# Altium PCB main.PcbDoc
Units mm, origin at the board's own origin, x right, y up, seen from the top; angles counter-clockwise.
Board outline 77.5 x 83.5 mm, 2 copper layers (Top Layer, Bottom Layer); 79 components, 62 nets, 302 pads, 57 vias.
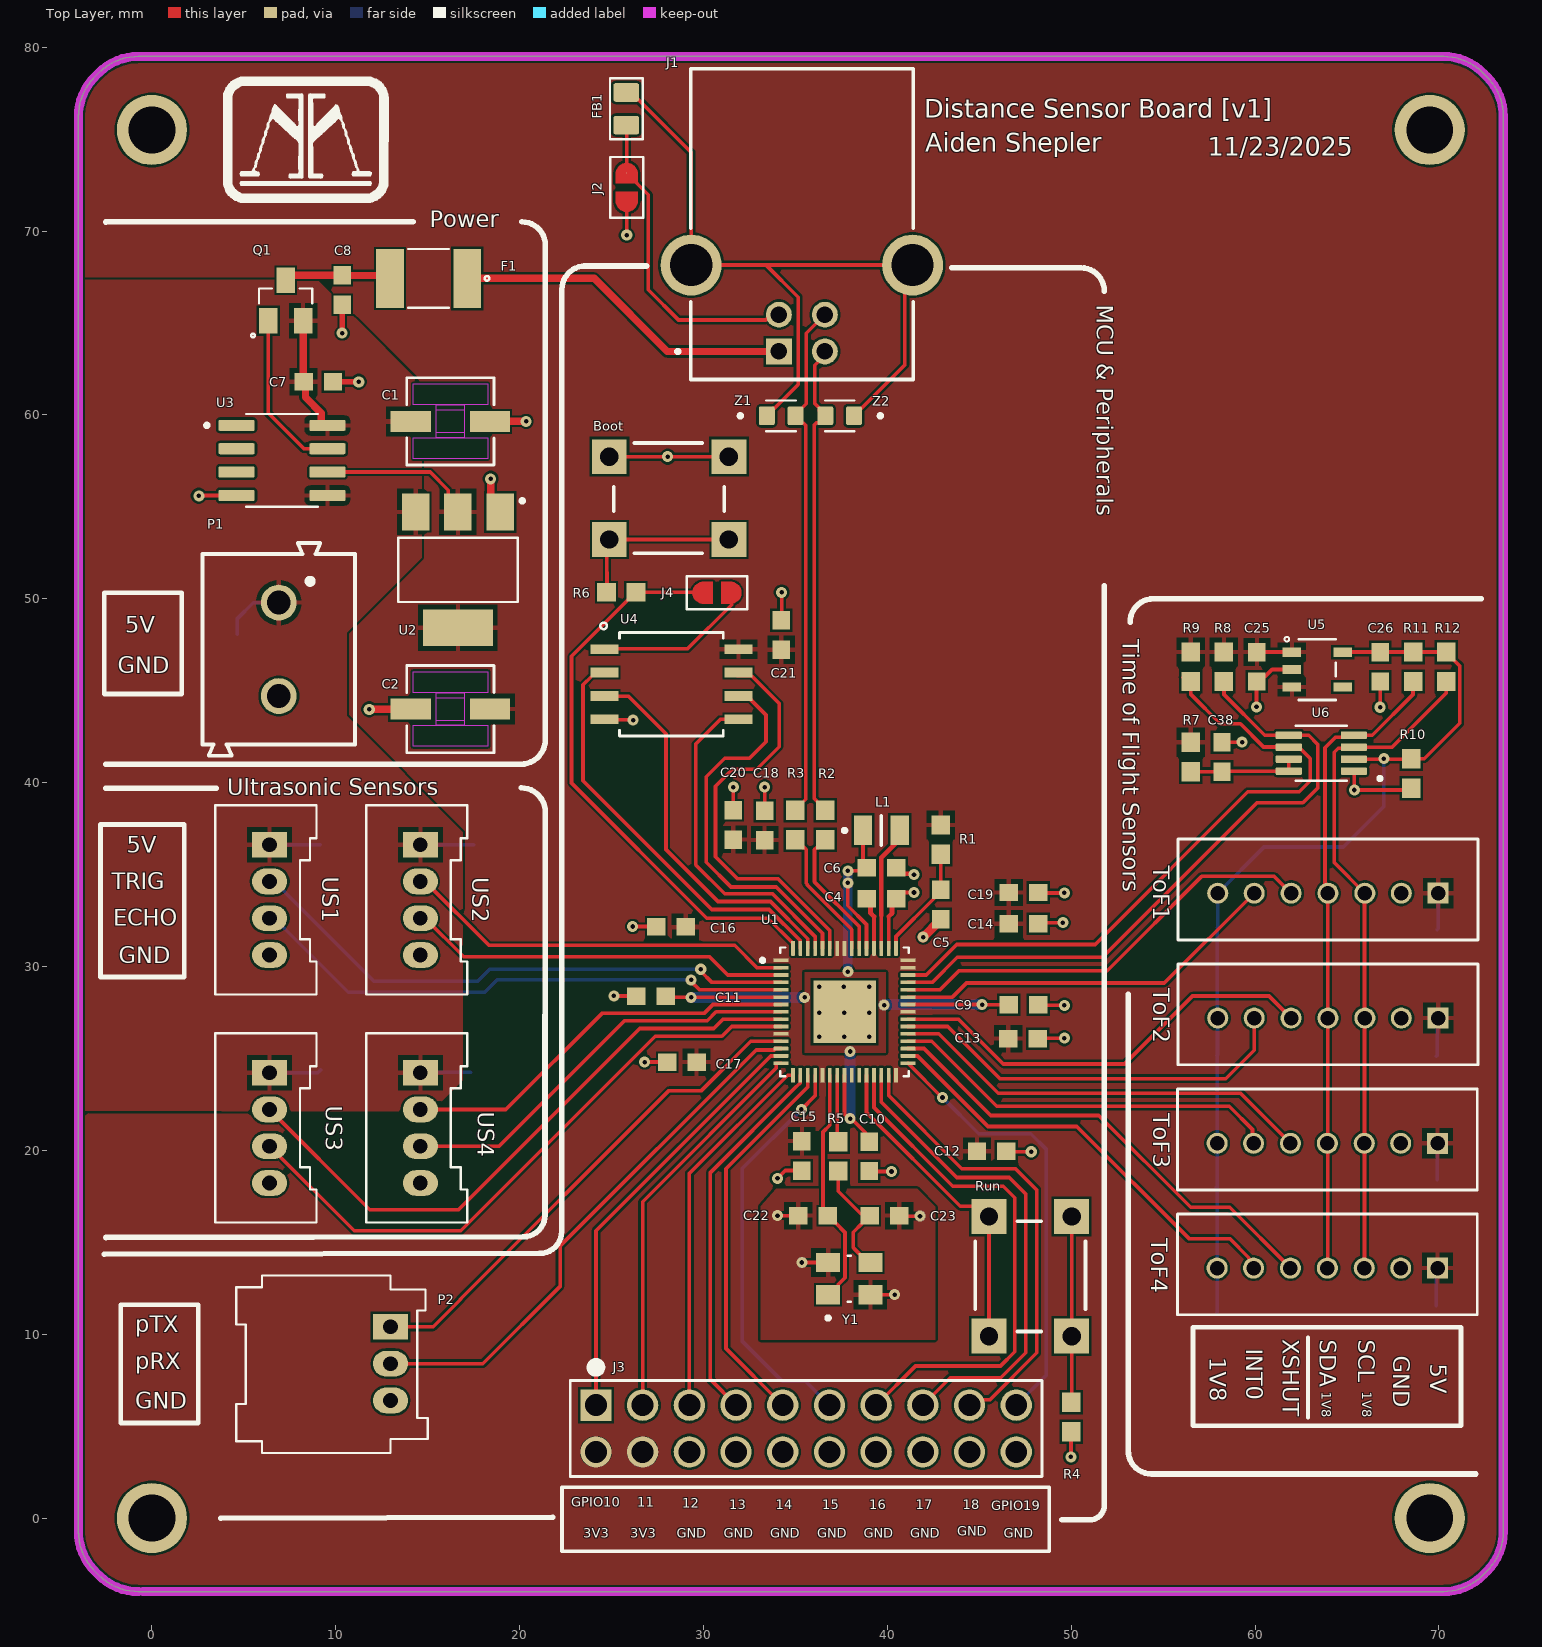
[diagram p0: Top Layer view]
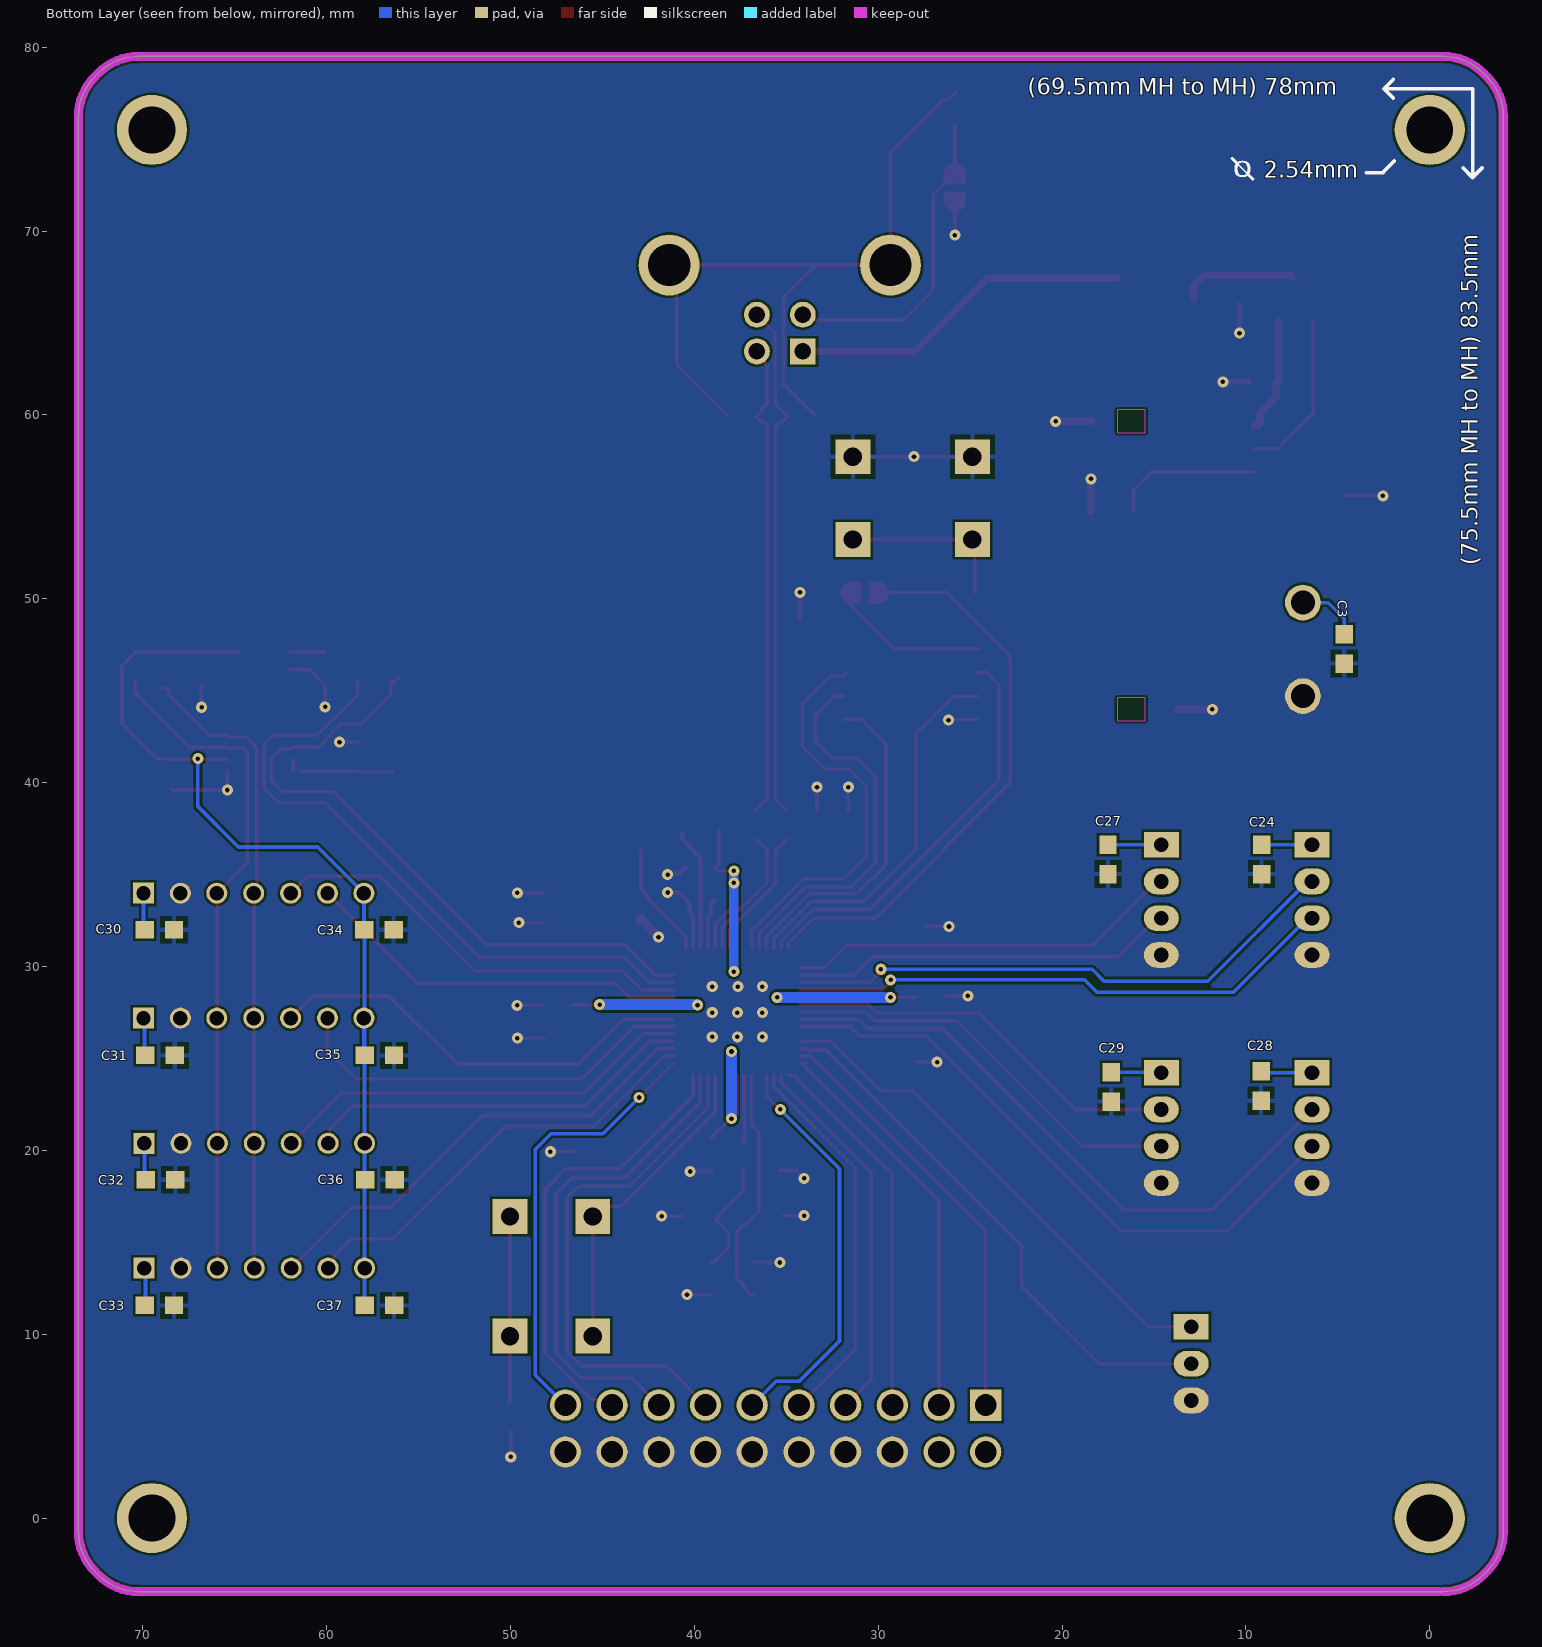
[diagram p1: Bottom Layer view, seen from below]

## Layer stack, top to bottom
Top Solder: solder mask 0.0102, Solder Resist, Dk 3.5
Top Layer: signal copper 0.0356
Dielectric 1: dielectric 0.32, FR-4, Dk 4.8
Bottom Layer: signal copper 0.0356
Bottom Solder: solder mask 0.0102, Solder Resist, Dk 3.5

## Board outline
-3.102,-2.898 cw(c-0.934,-0.73) -4,-0.73 -4,76.23 cw(c-0.934,76.23) -3.102,78.398 -2.898,78.602 cw(c-0.73,76.434) -0.73,79.5 70.23,79.5 cw(c70.23,76.434) 72.398,78.602 72.602,78.398 cw(c70.434,76.23) 73.5,76.23 73.5,-0.73 cw(c70.434,-0.73) 72.602,-2.898 72.398,-3.102 cw(c70.23,-0.934) 70.23,-4 -0.73,-4 cw(c-0.73,-0.934) -2.898,-3.102

## Design rules (kind name [scope] priority, off if disabled: settings)
Clearance [All] p1: gap=0.125 ignorepadtopadclearanceinfootprint=FALSE
DiffPairsRouting [All] p1: maxlimit=0.254 minlimit=0.2 mostfreqgap=0.254 toplayer_minwidth=0.2 toplayer_maxwidth=0.381 toplayer_prefwidth=0.2 bottomlayer_minwidth=0.2 bottomlayer_maxwidth=0.381 bottomlayer_prefwidth=0.2 maxuncoupledlength=12.7
PolygonConnect Polygon_5V_Connect [IsNamedPolygon('T.5V')] p1: connectstyle=Relief reliefconductorwidth=0.254 reliefentries=4 polygonreliefangle="90 Angle" airgapwidth=0.254
PolygonConnect Polygon_1V1-2_Connect_Direct [IsNamedPolygon('T.1V1-2')] p2: connectstyle=Direct reliefconductorwidth=0.254 reliefentries=4 polygonreliefangle="90 Angle" airgapwidth=0.254
PolygonConnect Polygon_3V3-1_Connect_Direct [IsNamedPolygon('T.3V3-1')] p3: connectstyle=Direct reliefconductorwidth=0.254 reliefentries=4 polygonreliefangle="90 Angle" airgapwidth=0.254
PolygonConnect Polygon_3V3-2/GND-12/1V1-1_Connect_Direct [IsNamedPolygon('T.1V1-1') or IsNamedPolygon('T.GND-1') or IsNamedPolygon('T.3V3-2') or IsNamedPolygon('B.GND-1') vs IsVia] p4: connectstyle=Direct reliefconductorwidth=0.254 reliefentries=4 polygonreliefangle="90 Angle" airgapwidth=0.254
PolygonConnect Polygon_3V3-2/GND-12/1V1-1_Connect_Relief90 [IsNamedPolygon('T.1V1-1') or IsNamedPolygon('T.GND-1') or IsNamedPolygon('B.GND-1') or IsNamedPolygon('T.3V3-2') vs (IsThruPin or IsSMTPin) and (PadShape_AllLayers <> 'Round')] p5: connectstyle=Relief reliefconductorwidth=0.254 reliefentries=4 polygonreliefangle="90 Angle" airgapwidth=0.254
RoutingVias [All] p1: holewidth=0.711 width=1.27 viastyle="Through Hole" minholewidth=0.2 minwidth=0.35 maxholewidth=0.711 maxwidth=1.27
SolderMaskExpansion [All] p1: expansion=0.102 istentingtop=FALSE
SupplyNets "Schematic Supply Nets_4" [InNet('1V1')] p1: voltage=0.000
SupplyNets "Schematic Supply Nets_3" [InNet('1V8')] p2: voltage=0.000
SupplyNets "Schematic Supply Nets_2" [InNet('5V')] p3: voltage=0.000
SupplyNets "Schematic Supply Nets_1" [InNet('GND')] p4: voltage=0.000
SupplyNets "Schematic Supply Nets" [InNet('3V3')] p5: voltage=0.000
Width [All] p1: maxlimit=0.6 minlimit=0.2 preferedwidth=0.2
29 further rules are at their usual default settings.

## Classes and differential pairs
component class MCU: ` Boot C1 C2 C3 C4 C5 C6 C7 C8 C9 C10 C11 C12 C13 C14 C15 C16 C17 C18 C19 C20 C21 C22 C23 F1 FB1 J1 J2 J3 J4 L1 P1 P2 Q1 R1 R2 R3 R4 R5 R6 Run U1 U2 U3 U4 Y1 Z1 Z2
component class Distance-Sensors: C24 C25 C26 C27 C28 C29 C30 C31 C32 C33 C34 C35 C36 C37 C38 R7 R8 R9 R10 R11 R12 ToF1 ToF2 ToF3 ToF4 U5 U6 US1 US2 US3 US4
differential pair DX: +DX_P -DX_N
differential pair D: +D_P -D_N

## Components (designator, comment, footprint, x,y, rotation, side; value= is the part's Value field where it differs from the comment)
Boot "BOOT" SPST-PUSH-BUTTON 28.125,55.475 r90 top (schematic designator B2)
C1 "10uF" RADIAL_CAN_CAP_4_X_5.8_SMD 16.234,59.65 r0 top
C2 "10uF" RADIAL_CAN_CAP_4_X_5.8_SMD 16.234,44 r180 top
C3 "Cap" CAPC0603 4.65,47.275 r270 bottom value=100nF
C4 "Cap" CAPC0603 39.675,33.675 r0 top value=4.7uF
C5 "Cap" CAPC0603 42.9,33.375 r270 top value=4.7uF
C6 "Cap" CAPC0603 39.675,35.375 r0 top value=4.7uF
C7 "Cap" CAPC0603 9.05,61.8 r0 top value=100nF
C8 "Cap" CAPC0603 10.35,66.8 r90 top value=100nF
C9 "Cap" CAPC0603 47.4,27.925 r0 top value=100nF
C10 "Cap" CAPC0603 39.025,19.675 r270 top value=4.7uF
C11 "Cap" CAPC0603 27.15,28.375 r180 top value=100nF
C12 "Cap" CAPC0603 45.675,19.95 r0 top value=100nF
C13 "Cap" CAPC0603 47.375,26.075 r0 top value=100nF
C14 "Cap" CAPC0603 47.4,32.325 r0 top value=100nF
C15 "Cap" CAPC0603 35.35,19.7 r270 top value=100nF
C16 "Cap" CAPC0603 28.225,32.15 r180 top value=100nF
C17 "Cap" CAPC0603 28.825,24.8 r180 top value=100nF
C18 "Cap" CAPC0603 33.325,37.675 r90 top value=100nF
C19 "Cap" CAPC0603 47.4,34.025 r0 top value=100nF
C20 "Cap" CAPC0603 31.625,37.7 r90 top value=100nF
C21 "Cap" CAPC0603 34.225,48.025 r90 top value=100nF
C22 "Cap" CAPC0603 35.95,16.45 r180 top value=100nF
C23 "Cap" CAPC0603 39.85,16.45 r0 top value=100nF
C24 "Cap" CAPC0603 9.15,35.825 r270 bottom value=100nF
C25 "Cap" CAPC0603 60.1,46.3 r270 top value=1uF
C26 "Cap" CAPC0603 66.8,46.3 r270 top value=1uF
C27 "Cap" CAPC0603 17.5,35.825 r270 bottom value=100nF
C28 "Cap" CAPC0603 9.175,23.5 r270 bottom value=100nF
C29 "Cap" CAPC0603 17.325,23.45 r270 bottom value=100nF
C30 "Cap" CAPC0603 69.1,32 r180 bottom value=100nF
C31 "Cap" CAPC0603 69.056,25.164 r180 bottom value=100nF
C32 "Cap" CAPC0603 69.025,18.4 r180 bottom value=100nF
C33 "Cap" CAPC0603 69.1,11.564 r180 bottom value=100nF
C34 "Cap" CAPC0603 57.156,32 r180 bottom value=100nF
C35 "Cap" CAPC0603 57.131,25.164 r180 bottom value=100nF
C36 "Cap" CAPC0603 57.1,18.4 r180 bottom value=100nF
C37 "Cap" CAPC0603 57.125,11.564 r180 bottom value=100nF
C38 "Cap" CAPC0603 58.2,41.4 r90 top value=100pF
F1 "MF-MSMF050-2" FUSM4632X85 15.05,67.425 r180 top
FB1 "MH2029-300Y" L0805 25.8,76.65 r270 top
J1 "USB-B" SAMTEC_USB-B-S-X-X-TH 35.35,68.15 r180 top
J2 "Thru-Hole Jumper" "[Jumper] Solderable Jumper" 25.825,72.375 r270 top
J3 "[Connector] 879142016" "[Connector] CONN20" 24.15,6.14 r0 top
J4 "Thru-Hole Jumper" "[Jumper] Solderable Jumper" 30.73,50.325 r0 top
L1 "3.3uH" 2016_SMD_Inductor 39.675,37.4 r0 top
P1 "2 port screw" "[CONNECTOR] 5MM_2PORT_SCREW" 6.9,47.25 r270 top
P2 "UART" MOLEX-HDR-1X3-SHERLOCK-RA 12.975,10.4 r90 top
Q1 "FDN340P" SOT95P240X120-3N 7.275,66.225 r90 top
R1 "Res" RES0603 42.9,36.9 r270 top value=33
R2 "Res" RES0603 36.625,37.7 r270 top value=27
R3 "Res" RES0603 35,37.7 r270 top value=27
R4 "Res" RES0603 50,5.5 r90 top value=1k
R5 "Res" RES0603 37.325,19.675 r90 top value=1k
R6 "Res" RES0603 25.525,50.35 r0 top value=1k
R7 "Res" RES0603 56.5,41.4 r270 top value=200k
R8 "Res" RES0603 58.3,46.3 r270 top value=10k
R9 "Res" RES0603 56.5,46.3 r270 top value=10k
R10 "Res" RES0603 68.5,40.5 r270 top value=300k
R11 "Res" RES0603 68.6,46.3 r270 top value=10k
R12 "Res" RES0603 70.4,46.3 r270 top value=10k
Run "BOOT" SPST-PUSH-BUTTON 47.775,13.15 r0 top (schematic designator B1)
ToF1 "ToF 1" 7POS_2MM_CONN 69.958,33.986 r0 top
ToF2 "ToF 2" 7POS_2MM_CONN 69.958,27.195 r0 top
ToF3 "ToF 3" 7POS_2MM_CONN 69.925,20.386 r0 top
ToF4 "ToF 4" 7POS_2MM_CONN 69.925,13.595 r0 top
U1 "[MCU] RP2350" QFN40P700X700X90-61N 37.67,27.536 r0 top
U2 "NCP1117LPST33T3G" SOT230P700X175-4N 16.641,51.575 r270 top
U3 "LMV358IDR" SOIC-8 7.075,57.525 r0 top
U4 "W25Q128JVSIQ TR" SOIC_208MIL_WIN 28.25,45.35 r0 top
U5 "ADPL40502AUJZ-1.8-R7" TSOT-23-5_UJ-5_ADI 63.378,46.15 r0 top
U6 "PCA9306DCTR" SOP65P400X130-8N 63.6,41.6 r180 top
US1 "USS1" MOLEX-HDR-1X4-SHERLOCK-VERT 6.4,36.625 r90 top
US2 "USS2" MOLEX-HDR-1X4-SHERLOCK-VERT 14.6,36.625 r90 top
US3 "USS3" MOLEX-HDR-1X4-SHERLOCK-VERT 6.4,24.225 r90 top
US4 "USS4" MOLEX-HDR-1X4-SHERLOCK-VERT 14.6,24.225 r90 top
Y1 "ABM8-272-T3" XTAL_ABM8-272-T3 37.925,13.025 r90 top
Z1 "VAR" VARC1608X56N 34.22,59.95 r0 top
Z2 "VAR" VARC1608X56N 37.405,59.95 r180 top

## Footprints (in the part's own frame and the unit in brackets; to place one, negate y for a bottom-side part, rotate by r counter-clockwise, add the part's x,y. Pads: shape width x height; smd on the part's side, far side on the other; paste and mask are expansions set on the pad)
7POS_2MM_CONN [mil]
  rect 45x45 / inner round 45 / far side rect 45x45 hole 31: 1(0,0)
  round 45 hole 31: 2(-79,0) 3(-157,0) 4(-236,0) 5(-315,0) 6(-394,0) 7(-472,0)
  silkscreen extent -557,-100 85,116, body extent -556,-100 86,118, height 337
2016_SMD_Inductor [mm] "0806 (2016 Metric)"
  rect 1x1.6 smd: 1(-1,0) 2(1,0)
  silkscreen extent -2.1,-0.8 0,0.8, body extent -1,-0.8 1,0.8, height 0.95
"[CONNECTOR] 5MM_2PORT_SCREW" [mm] "5.08 mm pitch 2 port screw terminal / 691213510002"
  round 1.95 hole 1.3: 1(-2.54,0) 2(2.54,0)
  silkscreen extent -5.78,-4.15 5.78,4.15, body extent -5.68,-4.04 5.68,4.06, height 10
"[Connector] CONN20" [mil]
  rect 67x67 / inner round 67 / far side rect 67x67 hole 47: 1(0,0)
  round 67 hole 47: 2(0,-100) 3(100,0) 4(100,-100) 5(200,0) 6(200,-100) 7(300,0) 8(300,-100) 9(400,0) 10(400,-100) 11(500,0) 12(500,-100) 13(600,0) 14(600,-100) 15(700,0) 16(700,-100) 17(800,0) 18(800,-100) 19(900,0) 20(900,-100)
  silkscreen extent -55,-153 955,91, body extent -50,-151 950,45, height 325
"[Jumper] Solderable Jumper" [mil]
  round 1 smd: 1(-30.71,0) 2(30.71,0)
  Top Layer region: 8.9,-23.62 8.9,23.62 28.9,23.62 28.9,23.62 39.15,21.28 47.37,14.73 51.93,5.26 51.93,-5.26 47.37,-14.73 39.15,-21.28 28.9,-23.62 28.9,-23.62
  Top Layer region: -8.9,-23.62 -8.9,23.62 -28.9,23.62 -28.9,23.62 -39.15,21.28 -47.37,14.73 -51.93,5.26 -51.93,-5.26 -47.37,-14.73 -39.15,-21.28 -28.9,-23.62 -28.9,-23.62
  silkscreen extent -65,-35 65,35
CAPC0603 [mm] "Chip Capacitor, 2-Leads, Body 1.60x0.80mm, IPC Medium Density"
  rect 1x0.95 smd: 1(-0.8,0) 2(0.8,0)
  body extent -0.88,-0.48 0.87,0.48, height 0.8
FUSM4632X85 [mm]
  rect 1.5x3.2 smd: 1(-2.1,0) 2(2.1,0)
  silkscreen extent -3.3,-1.6 1.1,1.6, body extent -2.27,-1.62 2.27,1.62, height 1.1
L0805 [mil]
  rrect25% 40x55 smd: 1(-35,0) 2(35,0)
  silkscreen extent -65,-35 65,35, body extent -39,-24 39,24, height 43
MOLEX-HDR-1X3-SHERLOCK-RA [mm]
  rect 1.397x1.905 hole 0.8: 1(0,0)
  oval 1.397x1.905 hole 0.8: 2(-2,0) 3(-4,0)
  silkscreen extent -6.86,-2.03 2.79,8.38, body extent -6.88,-1.99 2.82,8.51, height 5.75
MOLEX-HDR-1X4-SHERLOCK-VERT [mm]
  rect 1.397x1.905 hole 0.8: 1(0,0)
  oval 1.397x1.905 hole 0.8: 2(-2,0) 3(-4,0) 4(-6,0)
  silkscreen extent -8.15,-2.55 2.15,2.95, body extent -8.13,-2.57 2.17,2.98, height 8.5
QFN40P700X700X90-61N [mm] "RP2350"
  rrect25% 0.81x0.2 smd paste+0 mask+0.102: 1(-3.45,2.8) 2(-3.45,2.4) 3(-3.45,2) 4(-3.45,1.6) 5(-3.45,1.2) 6(-3.45,0.8) 7(-3.45,0.4) 8(-3.45,0) 9(-3.45,-0.4) 10(-3.45,-0.8) 11(-3.45,-1.2) 12(-3.45,-1.6) 13(-3.45,-2) 14(-3.45,-2.4) 15(-3.45,-2.8) 31(3.45,-2.8) 32(3.45,-2.4) 33(3.45,-2) 34(3.45,-1.6) 35(3.45,-1.2) 36(3.45,-0.8) 37(3.45,-0.4) 38(3.45,0) 39(3.45,0.4) 40(3.45,0.8) 41(3.45,1.2) 42(3.45,1.6) 43(3.45,2) 44(3.45,2.4) 45(3.45,2.8)
  rrect25% 0.2x0.81 smd paste+0 mask+0.102: 16(-2.8,-3.45) 17(-2.4,-3.45) 18(-2,-3.45) 19(-1.6,-3.45) 20(-1.2,-3.45) 21(-0.8,-3.45) 22(-0.4,-3.45) 23(0,-3.45) 24(0.4,-3.45) 25(0.8,-3.45) 26(1.2,-3.45) 27(1.6,-3.45) 28(2,-3.45) 29(2.4,-3.45) 30(2.8,-3.45) 46(2.8,3.45) 47(2.4,3.45) 48(2,3.45) 49(1.6,3.45) 50(1.2,3.45) 51(0.8,3.45) 52(0.4,3.45) 53(0,3.45) 54(-0.4,3.45) 55(-0.8,3.45) 56(-1.2,3.45) 57(-1.6,3.45) 58(-2,3.45) 59(-2.4,3.45) 60(-2.8,3.45)
  rect 3.4x3.4 smd paste-0.62 mask+0.102: 61(0,0)
  silkscreen extent -4.56,-3.5 3.5,3.5, body extent -3.55,-3.55 3.55,3.55, height 0.96
RADIAL_CAN_CAP_4_X_5.8_SMD [mil]
  rect 86x45 smd paste+0 mask+0: 1(-85,0) 2(85,0)
  Top Layer keep-out region: -30,-35 -30,35 30,35 30,-35
  Top Layer keep-out region: -80,-80 -80,-35 80,-35 80,-80
  Top Layer keep-out region: -80,35 -80,80 80,80 80,35
  Keep-Out Layer region: -30,-24.5 -30,24.5 30,24.5 30,-24.5
  silkscreen extent -94,-94 94,94, body extent -108,-89 108,89, height 242
RES0603 [mm] "Chip Resistor, 2-Leads, Body 1.60x0.80mm, IPC Medium Density"
  rect 1.05x1 smd: 1(-0.8,0) 2(0.8,0)
  body extent -0.88,-0.48 0.87,0.47, height 0.8
SAMTEC_USB-B-S-X-X-TH [mm]
  rect 1.408x1.408 / inner round 1.408 / far side rect 1.408x1.408 hole 0.9: 1(1.25,4.7)
  round 1.408 hole 0.9: 2(-1.25,4.7) 3(-1.25,2.7) 4(1.25,2.7)
  round 3.316 hole 2.3: S1(-6.02,0) S2(6.02,0)
  silkscreen extent -6.05,-10.67 6.85,6.22, body extent -7.25,-10.39 7.25,6.11, height 10.7
SOIC-8 [mm] "127P599X175-8N"
  rrect25% 1.97x0.6 smd: 1(-2.47,1.905) 2(-2.47,0.635) 3(-2.47,-0.635) 4(-2.47,-1.905) 5(2.47,-1.905) 6(2.47,-0.635) 7(2.47,0.635) 8(2.47,1.905)
  silkscreen extent -4.19,-2.52 1.95,2.52, body extent -3,-2.45 3,2.45, height 1.75
SOIC_208MIL_WIN [mil]
  rect 60x21 smd paste+0 mask+0: 1(-143.5,75) 2(-143.5,25) 3(-143.5,-25) 4(-143.5,-75) 5(143.5,-75) 6(143.5,-25) 7(143.5,25) 8(143.5,75)
  silkscreen extent -152,-111 111,132, body extent -159,-106 159,106, height 85
SOP65P400X130-8N [mm]
  rrect25% 1.42x0.4 smd: 1(-1.77,0.975) 2(-1.77,0.325) 3(-1.77,-0.325) 4(-1.77,-0.975) 5(1.77,-0.975) 6(1.77,-0.325) 7(1.77,0.325) 8(1.77,0.975)
  silkscreen extent -3.29,-1.5 1.4,1.5, body extent -2,-1.47 2,1.47, height 1.3
SOT95P240X120-3N [mm]
  rect 1.4x1 smd: 1(-1.1,0.95) 2(-1.1,-0.95) 3(1.1,0)
  silkscreen extent -2,-1.45 0.65,1.88, body extent -1.25,-1.46 1.25,1.46, height 1.12
SOT230P700X175-4N [mm]
  rect 2x1.5 smd: 1(-3.15,2.3) 2(-3.15,0) 3(-3.15,-2.3)
  rect 2x3.8 smd: 4(3.15,0)
  silkscreen extent -3.85,-3.25 1.75,3.6, body extent -3.5,-3.25 3.5,3.25, height 1.8
SPST-PUSH-BUTTON [mm] "1825910-6"
  rect 1.9x1.9 hole 1: 1(2.25,3.25) 2(2.25,-3.25) 3(-2.25,-3.25) 4(-2.25,3.25)
  silkscreen extent -3,-3 3,3, body extent -3,-4 2.99,3.8, height 5.11
TSOT-23-5_UJ-5_ADI [mil] "SOT23_5, Thin"
  rect 39.5x20 smd paste+0 mask+0: 1(-54.25,37.4) 2(-54.25,0) 3(-54.25,-37.4) 4(54.25,-37.4) 5(54.25,37.4)
  silkscreen extent -70,-65 40,70, body extent -60,-60 60,60, height 39
VARC1608X56N [mm]
  rrect25% 0.87x1.02 smd: 1(-0.78,0) 2(0.78,0)
  silkscreen extent -2.31,-0.83 0.8,0.83, body extent -0.8,-0.4 0.8,0.4, height 0.33
XTAL_ABM8-272-T3 [mm]
  rect 1.05x1.3 smd: 1(-0.875,1.15) 2(-0.875,-1.15) 3(0.875,-1.15) 4(0.875,1.15)
  silkscreen extent -2.24,-0.09 1.25,1.25, body extent -1.25,-1.6 1.25,1.6, height 0.7

## Part data
Boot Run: library part 1825910-6, "SWITCH TACTILE SPST-NO 0.05A 24V", Contact Current Rating=50mA, Contact Resistance=100mR, Manufacturer="TE Connectivity Alcoswitch", Max Operating Temperature=85°C, Max Voltage Rating (DC)=24V, Min Operating Temperature=-35°C, Operating Force=160gf, Package Quantity=750, Supplier Part Number 1=450-1650-ND, Actuator Length=0.055inch, Actuator Material=PBT, Actuator Type=Standard, Category="Pushbutton Switches", ComponentLink1Description=https://datasheet.ciiva.com/30199/1825910-6rqpn1825910-6-30199520.pdf?src-supplier=Onlinecomponents.com, ComponentLink1URL=https://datasheet.ciiva.com/30199/1825910-6rqpn1825910-6-30199520.pdf?src-supplier=Onlinecomponents.com, ComponentLink2Description=https://datasheet.ciiva.com/15184/getdatasheetpartid-395915-15184509.pdf?src-supplier=Verical, ComponentLink2URL=https://datasheet.ciiva.com/15184/getdatasheetpartid-395915-15184509.pdf?src-supplier=Verical, Contact Material="Copper Alloy", Contact Plating=Silver, Electrical Life=100000Cycles, ELV=Compliant, Illumination Type=Non-Illuminated,Illuminated, Lead Free="Lead Free", Length=5.99mm, Manufacturer Part Number=1825910-6, Max Current Rating=50mA, Mechanical Life=100000Cycles, Mount="Through Hole", Orientation=Straight, Packaging="Loose Piece", Pricing 1="1=0,10000, 10=0,10100, 25=0,09560, 100=0,08700, 250=0,08180, 500=0,07484, 1000=0,06265, 2500=0,06092, 5000=0,05743 (USD)", REACH SVHC=Unknown, RoHS=Yes, Stock 1=97530, Supplier 1=Digi-Key, Switch Function=Off-Mom, Switch Travel=0.25mm, Termination="PC Pins", Throw Configuration=SPST, Type=Switch
C1 C2: library part EEE-FK1E100R, "10uF electrolytic cap, radial can, SMD", Manufacturer_Name=Panasonic, Copyright="Copyright (C) 2025 Ultra Librarian. All rights reserved.", Manufacturer_Part_Number=EEE-FK1E100R
C3 C4 C5 C6 C7 C8 C9 C10 C11 C12 C13 C14 C15 C16 C17 C18 C19 C20 C21 C22 C23 C24 C25 C26 C27 C28 C29 C30 C31 C32 C33 C34 C35 C36 C37 C38: Supplier Part Number 1=1276-1000-1-ND, Supplier 1=Digi-Key
F1: "[Fuse] Polymeric PTC Resettable Fuse 15V 500 mA Ih Surface Mount 1812 (4532 Metric), Concave", Package="1812 Bourns", Availability="In Stock", Check_prices=https://www.snapeda.com/parts/MF-MSMF050-2/Bourns+-+J.W.+Miller/view-part/?ref=eda, MF=Bourns, MP=MF-MSMF050-2, Price=None, Purchase-URL=https://pricing.snapeda.com/search/part/MF-MSMF050-2/?ref=eda, SnapEDA_Link=https://www.snapeda.com/parts/MF-MSMF050-2/Bourns+-+J.W.+Miller/view-part/?ref=snap
FB1: "[Inductor] Ferrite Bead Bourns MH2029-300Y / SMD-FERRITE-BEAD-30R-3A(0805)", Package="0805 Bourns", Check_prices=https://www.snapeda.com/parts/MH2029-300Y/Bourns/view-part/?ref=eda, MF=Bourns, MP=MH2029-300Y, SnapEDA_Link=https://www.snapeda.com/parts/MH2029-300Y/Bourns/view-part/?ref=snap
J1: library part USB-B-S-X-X-TH, "USB-B (USB TYPE-B) USB 2.0 Receptacle Connector 4 Position Through Hole, Right Angle", Package=None, Check_prices=https://www.snapeda.com/parts/USB-B-S-F-W-TH-TR/Samtec/view-part/?ref=eda, MF=Samtec, MP=USB-B-S-F-W-TH-TR, SnapEDA_Link=https://www.snapeda.com/parts/USB-B-S-F-W-TH-TR/Samtec/view-part/?ref=snap
J2 J4: library part "[Jump] Thru-Hole 2pin", "Clip Jumper", NO/NC=NC
J3: "2x10 2.54mm pitch header", Package=None, Availability=Unavailable, MP=879142016, Price=None
L1: library part "INDUCTOR 3.3uH", "Power Inductors - SMD IND 3.3uH used for RP2350 VREG", Manufacturer_Name=ABRACON, Manufacturer_Part_Number=AOTA-B201610S3R3-101-T, Mouser Part Number=815-AB201610S3R3101T, Datasheet Link=https://abracon.com/datasheets/AOTA-B201610S3R3-101-T.pdf, Geometry.Height=1mm, Mouser Price/Stock=https://www.mouser.co.uk/ProductDetail/ABRACON/AOTA-B201610S3R3-101-T?qs=%252BXxaIXUDbq0IZvJW%2F2mv4w%3D%3D
P1: library part "[Connector] 691213510002", "2 Position Wire to Board Terminal Block Horizontal with Board 0.200 (5.08mm) Through Hole", Package=None, Check_prices=https://www.snapeda.com/parts/691213510002/W%25C3%25BCrth+Elektronik+Midcom/view-part/?ref=eda, MF="WÃ¼rth Elektronik", MP=691213510002, SnapEDA_Link=https://www.snapeda.com/parts/691213510002/W%25C3%25BCrth+Elektronik+Midcom/view-part/?ref=snap
P2: library part MOLEX-HDR-1x3-SHERLOCK_RA, "Header, Molex, 2mm Pitch Sherlock Header, Single Row, Right Angle 3 Circuits, Length 3.3mm", Manufacturer="Molex Connector Corporation", Manufacturer Part Number=35363-0360, Supplier Part Number 1=WM18932-ND, Supplier 1=Digi-Key
Q1: library part "[PMOS] FDN340P", "[MOSFET-P] P-Channel 20 V 2A (Ta) 500mW (Ta) Surface Mount SOT-23-3", Package="TO-236-3 ON", Check_prices=https://www.snapeda.com/parts/FDN340P/Onsemi/view-part/?ref=eda, MF=onsemi, MP=FDN340P, SnapEDA_Link=https://www.snapeda.com/parts/FDN340P/Onsemi/view-part/?ref=snap
R1 R2 R3 R4 R5 R6 R7 R8 R9 R10 R11 R12: "SMD, RES0603", Supplier Part Number 1=RMCF0603JT10K0CT-ND, Supplier 1=Digi-Key
ToF1 ToF2 ToF3 ToF4: library part MOLEX_SHERLOCK_1x7_CONN, "1x7 2mm pitch sherlock connector", Package=None, Availability=Unavailable, MP=353620750, Price=None
U1: library part SC1509(13), "RP2350A MCU from Raspberry Pi Pico; QFN 60 7x7,", Package=None, Check_prices=https://www.snapeda.com/parts/SC1509-A4/Raspberry+Pi/view-part/?ref=eda, MF="Raspberry Pi", MP=SC1509-A4, SnapEDA_Link=https://www.snapeda.com/parts/SC1509-A4/Raspberry+Pi/view-part/?ref=snap
U2: "Linear Voltage Regulator IC Positive Fixed 1 Output 1A SOT-223", Package="SOT-223-4 ON Semiconductor", Check_prices=https://www.snapeda.com/parts/NCP1117LPST33T3G/Onsemi/view-part/?ref=eda, MF="ON Semiconductor", MP=NCP1117LPST33T3G, SnapEDA_Link=https://www.snapeda.com/parts/NCP1117LPST33T3G/Onsemi/view-part/?ref=snap
U3: "[Op-Amp] Dual, 5.5-V, 1-MHz, RRO operational amplifier 8-SOIC -40 to 125", Manufacturer_Name="Texas Instruments", Copyright="Copyright (C) 2025 Ultra Librarian. All rights reserved.", Datasheet=https://www.ti.com/lit/gpn/lmv358, Manufacturer_Part_Number=LMV358IDR, RefDes=RefDes, Type=Type
U4: "IC FLASH 128MBIT SPI/QUAD 8SOIC", Manufacturer_Name=Winbond, Copyright="Copyright (C) 2025 Ultra Librarian. All rights reserved.", Manufacturer_Part_Number="W25Q128JVSIQ TR", RefDes=RefDes, Type=Type
U5: "Low Noise, 200mA, CMOS Linear Regulator (LDO)", Manufacturer_Name="Analog Devices Inc", Copyright="Copyright (C) 2025 Ultra Librarian. All rights reserved.", Manufacturer_Part_Number=ADPL40502AUJZ-1.8-R7, RefDes=RefDes, Type=Type
U6: "2-bit bidirectional 400-kHz I2C/SMBus voltage level translator", Package="SSOP-8 Texas Instruments", Check_prices=https://www.snapeda.com/parts/PCA9306DCTR/Texas+Instruments/view-part/?ref=eda, MF="Texas Instruments", MP=PCA9306DCTR, SnapEDA_Link=https://www.snapeda.com/parts/PCA9306DCTR/Texas+Instruments/view-part/?ref=snap
US1 US2 US3 US4: library part MOLEX-HDR-1x4-SHERLOCK_VERT, "Header, Molex, 2mm Pitch Sherlock Header, Single Row, Vertical, 4 Circuits, Length 3.3mm, 0353620450"
Y1: "12 MHz Â±30ppm Crystal 10pF 50 Ohms 4-SMD, No Lead", Package="NON-STANDARD-4 Abracon", Check_prices=https://www.snapeda.com/parts/ABM8-272-T3/Abracon/view-part/?ref=eda, MF=ABRACON, MP=ABM8-272-T3, SnapEDA_Link=https://www.snapeda.com/parts/ABM8-272-T3/Abracon/view-part/?ref=snap
Z1 Z2: library part CG0603MLC-05E, "[Varistor] 1 Circuit Surface Mount, MLCV 0603 (1608 Metric)", Package="0603 Bourns Inc.", Availability="In Stock", Check_prices=https://www.snapeda.com/parts/CG0603MLC-05E/Bourns+-+J.W.+Miller/view-part/?ref=eda, MF=Bourns, MP=CG0603MLC-05E, Price=None, Purchase-URL=https://pricing.snapeda.com/search/part/CG0603MLC-05E/?ref=eda, SnapEDA_Link=https://www.snapeda.com/parts/CG0603MLC-05E/Bourns+-+J.W.+Miller/view-part/?ref=snap

## Free pads (board coordinates)
  round 3.81 hole 2.54: MH(0,0) MH(0,75.5) MH(69.5,0) MH(69.5,75.5)

## Via types
v1: diameter 0.6, hole 0.25, Top Layer to Bottom Layer, tented both sides, 57 vias

## Nets (pads, with @x,y where several pads share a name; then routed paths per layer and width w, separated by ;. In a path a pad name is that pad's centre, name@x,y a point inside that pad or via, vN(x,y) a via of type N, cw(c..) or ccw(c..) an arc to the next point about the centre after c; other vN are vias at no path point)
1V1: C6.1 C9.1 C10.1 C11.1 L1.1 U1.6 U1.23 U1.39 U1.50 | length 43.8
  Top Layer w0.2: C11.1@27.95,28.325 C11.1@27.961,28.336 ; C11.1@27.95,28.336 C11.1@27.961,28.336 ; U1.6 C11.1@27.961,28.336 ; U1.23 37.67,21.962 37.975,21.656 v1@37.975,21.575 ; v1(37.85,34.55) 37.85,33.3 38.87,32.28 U1.50 ; v1(37.85,35.2) 38.7,35.2 C6.1 38.675,35.575 L1.1 ; v1(37.975,21.725) 38.05,21.725 39.125,20.65 C10.1@39.125,20.625 ; U1.39 v1@45.139,27.936 ; v1(45.15,27.925) C9.1
  Bottom Layer w0.5: v1(37.85,29.725) v1(37.85,34.55) v1(37.85,35.2)
  Bottom Layer w0.6: v1(29.331,28.326) v1@35.5,28.325 ; v1(37.975,21.725) v1(37.975,25.375) ; v1(39.825,27.9) 39.85,27.925 v1(45.15,27.925)
  other v1: 35.5,28.325
1V8: C26.1 C34.1 C35.1 C36.1 C37.1 R10.1 R11.1 R12.1 ToF1.7 ToF2.7 ToF3.7 ToF4.7 U5.5 U6.2 | length 54.8
  Top Layer w0.2: U5.5 C26.1 R12.1 70.4,47.075 71.127,46.348 71.127,43.227 69.2,41.3 R10.1 68.475,41.275 U6.2
  Bottom Layer w0.2: C36.1@57.9,18 C36.1@57.936,18.036 ; C37.1@57.925,11.2 57.936,11.211 ToF4.7 C36.1@57.936,18.036 ; C35.1 C35.1@57.936,25.169 ; C34.1 57.936,31.98 C35.1@57.936,25.169 ; C34.1@57.956,32.139 57.969,32.152 ToF1.7 60.483,36.5 64.8,36.5 67,38.7 v1(67,41.3) ; ToF2.7@57.969,27.234 ToF2.7 57.969,25.202 C35.1@57.936,25.169 ; C36.1@57.936,18.036 ToF3.7 C35.1@57.936,25.169
3V3: C2.1 C4.1 C12.1 C13.1 C14.1 C15.1 C16.1 C17.1 C18.1 C19.1 C20.1 C21.1 C25.1 C30.1 C31.1 C32.1 C33.1 J3.2 J3.4 R1.1 R7.1 R8.1 R9.1 ToF1.1 ToF2.1 ToF3.1 ToF4.1 U1.1 U1.11 U1.20 U1.30 U1.38 U1.44 U1.45 U1.49 U1.53 U1.54 U2.2 U2.4 U3.6 U4.8 U5.1 U5.3 | length 21.1
  Top Layer w0.2: U3.6 15.135,56.89 16.117,55.908 16.117,54.801 U2.2@16.041,54.725 ; U1.49 39.27,32.72 ; C25.1 U5.1
  Top Layer w0.254: C4.1@38.901,33.612 39.085,33.428 39.085,32.905 39.27,32.72
  Bottom Layer w0.2: C33.1@69.85,11.564 69.85,13.52 ToF4.1 ; C31.1@69.856,25.114 69.908,25.166 ToF2.1@69.908,27.234 ; C32.1@69.9,18.4 69.9,20.361 ToF3.1 ; C30.1 69.958,32.058 ToF1.1
5V: C1.1 C3.1 C7.1 C24.1 C27.1 C28.1 C29.1 P1.1 Q1.2 U2.3 U3.5 U3.8 US1.1 US2.1 US3.1 US4.1 | length 21
  Top Layer w0.4: C7.1@8.225,61.8 Q1.2 ; C7.1 8.352,61.698 8.352,60.959 9.216,60.096 9.216,59.53 9.316,59.43 U3.8
  Bottom Layer w0.2: C3.1 4.65,48.925 5.515,49.79 P1.1 ; US3.1 9.025,24.225 C28.1@9.175,24.375 ; US1.1 C24.1 ; US4.1 14.625,24.25 C29.1 ; US2.1 C27.1
AMP_OUT: Q1.1 U3.7 | length 9
  Top Layer w0.2: Q1.1 6.325,60.1 8.265,58.16 U3.7
D_N: J1.2 R2.1 Z2.2 | length 26
  Top Layer w0.2: J1.2 36.6,63.25 36.047,62.697 36.047,60.623 36.295,60.375 36.295,60.23 36.625,59.9 36.295,59.57 36.142,59.57 36.02,59.448 36.02,39.13 36.625,38.525 R2.1
D_P: J1.3 R3.1 Z1.2 | length 28.3
  Top Layer w0.2: R3.1 35,38.525 35.566,39.091 35.566,59.426 35.446,59.545 35.28,59.545 34.95,59.875 34.95,60.025 35.005,60.025 35.593,60.613 35.593,64.443 J1.3
DX_N: R2.2 U1.51 | length 7.2
  Top Layer w0.2: R2.2 36.625,36.875 36.225,36.475 36.157,36.475 36.04,36.358 36.04,34.601 38.47,32.171 U1.51
DX_P: R3.2 U1.52 | length 7.2
  Top Layer w0.2: R3.2 35,36.875 35.4,36.475 35.468,36.475 35.586,36.358 35.586,34.525 35.639,34.471 35.639,34.436 38.07,32.005 U1.52
ECHO_1: U1.5 US1.3 | length 30
  Top Layer w0.2: v1(29.325,29.275) 29.325,29.187 29.776,28.736 U1.5
  Bottom Layer w0.2: US1.3 6.654,32.625 10.679,28.6 18.1,28.6 18.775,29.275 v1(29.325,29.275)
ECHO_2: U1.3 US2.3 | length 20.9
  Top Layer w0.2: US2.3 14.854,32.625 16.954,30.525 30.325,30.525 31.314,29.536 U1.3
ECHO_3: U1.10 US3.3 | length 34.3
  Top Layer w0.2: US3.3 11,15.625 16.8,15.625 27.375,26.2 31,26.2 31.536,26.736 U1.10
ECHO_4: U1.8 US4.3 | length 22.6
  Top Layer w0.2: US4.3 18.875,20.225 25.7,27.05 30.2,27.05 30.686,27.536 U1.8
FLASH_SS: J4.2 U4.1 | length 8
  Top Layer w0.2: U4.1@24.518,47.275 29.135,47.275 31.535,49.675
GND: Boot.1 Boot.2 C1.2 C2.2 C3.2 C4.2 C5.2 C6.2 C7.2 C8.1 C9.2 C10.2 C11.2 C12.2 C13.2 C14.2 C15.2 C16.2 C17.2 C18.2 C19.2 C20.2 C21.2 C22.2 C23.2 C24.2 C25.2 C26.2 C27.2 C28.2 C29.2 C30.2 C31.2 C32.2 C33.2 C34.2 C35.2 C36.2 C37.2 C38.2 J2.2 J3.6 J3.8 J3.10 J3.12 J3.14 J3.16 J3.18 J3.20 P1.2 P2.3 R4.1 R10.2 ToF1.2 ToF2.2 ToF3.2 ToF4.2 U1.47 U1.61 U2.1 U3.4 U4.4 U5.2 U6.1 US1.4 US2.4 US3.4 US4.4 Y1.2 Y1.4 | length 60.9
  Top Layer w0.2: v1(2.55,55.6) 2.55,55.62 U3.4 ; C1.2 C1.2@18.418,59.675 ; U2.1@18.425,54.75 U2.1@18.45,54.725 ; U4.4 24.628,43.423 26.153,43.423 v1(26.175,43.4) ; Boot.1 Boot.2 ; v1(25.125,28.4) 26.325,28.4 C11.2 ; v1(25.825,69.775) J2.2 ; v1(26.15,32.175) 27.4,32.175 C16.2 ; v1(26.798,24.802) C17.2@27.952,24.802 ; C17.2@27.752,24.827 C17.2@27.775,24.85 ; C20.2 v1(31.625,39.75) ; C18.2 v1(33.325,39.75) ; v1(34.025,16.45) C22.2 ; v1(34.025,18.475) 34.45,18.9 C15.2 ; C21.2 34.25,48.85 v1(34.25,50.35) ; v1(35.35,13.9) Y1.4 ; C10.2 39.05,18.85 v1(40.225,18.85) ; Y1.2 v1(40.4,12.15) ; U1.47 40.07,32.72 ; C4.2 40.825,34.025 v1(41.45,34.025) ; C23.2 40.675,16.425 v1(41.775,16.425) ; C12.2 46.5,19.925 v1(47.825,19.925) ; C13.2 48.2,26.1 v1(49.625,26.1) ; C9.2 48.238,27.887 v1(49.631,27.887) ; C14.2 48.26,32.385 v1(49.54,32.385) ; C19.2 48.225,34 v1(49.625,34) ; v1(49.983,3.327) 49.983,4.683 R4.1 ; C38.2 v1(59.3,42.2) ; v1(60.077,44.123) 60.077,45.302 60.925,46.15 U5.2 ; U6.1 65.4,40.595 v1(65.4,39.6) 68.4,39.6 R10.2 ; v1(66.8,44.1) C26.2@66.8,45.3
  Top Layer w0.254: 40.07,32.72 40.255,32.905 40.255,33.416 C4.2@40.451,33.612 ; C6.2@40.476,35.39 40.824,35.042 41.408,35.042 v1(41.45,35)
  Top Layer w0.3: C7.2 v1(11.25,61.8) ; v1(10.35,64.45) C8.1
  Top Layer w0.4: v1(11.82,43.989) C2.2@13.727,43.989 ; C1.2@18.418,59.675 18.443,59.65 v1(20.35,59.65) ; U2.1@18.425,54.75 v1(18.425,56.525)
  Top Layer w0.5: v1(41.95,31.6) C5.2@42.888,32.538
  Top Layer w0.6: C5.2@42.888,32.538 C5.2@42.888,32.552
  other v1: 36.3,26.175 37.661,26.175 39.025,26.175 36.3,27.489 37.661,27.489 39.025,27.489 36.3,28.9 37.636,28.9 39.025,28.9 28.05,57.725
GPIO10: J3.1 U1.14 | length 23.5
  Top Layer w0.2: J3.1 24.15,15.625 33.661,25.136 U1.14
GPIO11: J3.3 U1.15 | length 21.9
  Top Layer w0.2: J3.3 26.69,17.206 33.962,24.479 33.962,24.736 U1.15
GPIO12: J3.5 U1.16 | length 20.5
  Top Layer w0.2: J3.5 29.23,18.74 34.576,24.086 U1.16
GPIO13: J3.7 U1.17 | length 20.6
  Top Layer w0.2: J3.7 30.375,7.535 30.375,18.8 35.029,23.454 35.049,23.454 35.27,23.675 U1.17
GPIO14: J3.9 U1.18 | length 21.1
  Top Layer w0.2: J3.9 31.225,9.225 31.225,19 35.67,23.445 U1.18
GPIO15: J3.11 U1.19 | length 22.3
  Top Layer w0.2: v1(35.325,22.225) 36.07,22.97 U1.19
  Bottom Layer w0.2: v1(35.325,22.225) 32.1,19 32.1,9.625 34.275,7.45 35.54,7.45 J3.11
GPIO16: J3.13 U1.27 | length 28.6
  Top Layer w0.2: U1.27 39.27,22.33 43.55,18.05 46.3,18.05 46.925,17.425 46.925,9.05 46.15,8.275 41.525,8.275 J3.13
GPIO17: J3.15 U1.28 | length 26.8
  Top Layer w0.2: U1.28 39.67,22.63 43.775,18.525 46.625,18.525 47.525,17.625 47.525,8.988 46.17,7.632 43.422,7.632 J3.15
GPIO18: J3.17 U1.29 | length 25
  Top Layer w0.2: U1.29 40.07,22.98 44.05,19 46.975,19 48.125,17.85 48.125,8.989 45.564,6.427 44.757,6.427 J3.17
GPIO19: J3.19 U1.31 | length 24.1
  Top Layer w0.2: U1.31 v1@42.99,22.865
  Bottom Layer w0.2: v1(43,22.875) 44.973,20.902 47.798,20.902 48.65,20.05 48.65,7.78 J3.19
INT0_1: ToF1.6 U1.40 | length 21.2
  Top Layer w0.2: U1.40 43.536,28.336 44.3,29.1 55.064,29.1 ToF1.6
INT0_2: ToF2.6 U1.36 | length 22.4
  Top Layer w0.2: U1.36 43.289,26.736 46.125,23.9 58.4,23.9 59.95,25.45 ToF2.6
INT0_3: ToF3.6 U1.34 | length 21.5
  Top Layer w0.2: U1.34 42.414,25.936 45.95,22.4 58.6,22.4 59.86,21.14 59.86,20.444 ToF3.6
INT0_4: ToF4.6 U1.32 | length 23.8
  Top Layer w0.2: U1.32 41.639,25.136 45.475,21.3 50.3,21.3 56.4,15.2 58.617,15.2 59.654,14.164 59.654,14.114 59.917,13.85 ToF4.6
NetB1_1: R4.2 Run.1 Run.2 | length 10.1
  Top Layer w0.2: Run.1 Run.2 50.025,6.375 R4.2@50.1,6.3
NetC23_1: C23.1 R5.1 Y1.3 | length 6.4
  Top Layer w0.2: R5.1 37.325,17.775 38.85,16.25 38.825,16.25 38.65,16.075 38.65,16.05 38.15,15.55 38.15,14.7 38.209,14.641 38.95,13.9 Y1.3
NetC38_1: C38.1 R7.2 U6.7 U6.8 | length 5.6
  Top Layer w0.2: R7.2@56.4,40.6 C38.1 ; C38.1@58.3,40.625 U6.8@61.43,40.625 ; U6.8 U6.7
NetF1_1: F1.1 J1.1 | length 18.7
  Top Layer w0.4: F1.1@17,67.425 F1.1 24.05,67.425 28.025,63.45 J1.1
NetFB1_1: FB1.1 J1.S1 J1.S2 Z1.1 Z2.1 | length 42.2
  Top Layer w0.2: FB1.1 26.191,77.148 26.452,77.148 29.33,74.27 J1.S2 33.4,68.15 ; Z1.1 33.44,60.02 33.774,60.355 33.845,60.355 35.15,61.66 35.15,66.4 33.4,68.15 ; Z2.1 40.95,62.715 40.95,67.73 J1.S1 33.4,68.15
QSPI_SCLK: U1.56 U4.6 | length 20.8
  Top Layer w0.2: U4.6 32.39,44.715 32.557,44.548 32.557,44.518 33.4,43.675 33.4,42.225 32.5,41.325 31.15,41.325 30.15,40.325 30.15,35.675 31.5,34.325 33.95,34.325 36.47,31.805 U1.56
QSPI_SD0: U1.57 U4.5 | length 18.2
  Top Layer w0.2: U4.5 30.92,43.445 29.575,42.1 29.575,35.525 31.15,33.95 33.75,33.95 36.07,31.63 U1.57
QSPI_SD1: U1.59 U4.2 | length 22.5
  Top Layer w0.2: U4.2 24.11,45.985 23.943,45.818 23.45,45.325 23.45,40.1 30.45,33.1 33.567,33.1 35.27,31.397 U1.59
QSPI_SD2: U1.58 U4.3 | length 20.7
  Top Layer w0.2: U4.3 24.62,44.7 25.925,44.7 27.962,42.663 27.962,36.363 30.792,33.533 33.642,33.533 35.67,31.505 U1.58
QSPI_SD3: U1.55 U4.7 | length 22.4
  Top Layer w0.2: U4.7@31.764,45.906 31.852,45.818 32.607,45.818 34.125,44.3 34.125,41.95 32.9,40.725 31.575,40.725 30.65,39.8 30.65,35.975 31.85,34.775 34.05,34.775 36.87,31.955 U1.55
QSPI_SS: J4.1 R6.2 U1.60 | length 31.4
  Top Layer w0.2: J4.1 29.925,50.35 R6.2 26.3,50.35 22.825,46.875 22.825,39.975 30.175,32.625 33.5,32.625 34.834,31.291 34.87,31.291 U1.60
RUN: Run.3 Run.4 U1.26 | length 17.5
  Top Layer w0.2: U1.26 38.87,22.055 43.967,16.958 44.967,16.958 Run.4 Run.3
SCL_1V8: R12.2 ToF1.3 ToF2.3 ToF3.3 ToF4.3 U6.3 | length 36.8
  Top Layer w0.2: ToF4.3 65.953,13.611 65.953,33.97 ToF1.3 64.3,35.656 64.3,41.646 64.522,41.868 65.313,41.868 U6.3 67.45,41.925 70.4,44.875 R12.2
SCL_3V3: R9.2 U1.43 U6.6 | length 36.5
  Top Layer w0.2: U1.43 42.111,29.536 43.775,31.2 51.3,31.2 59.6,39.5 62.4,39.5 63,40.1 63,41.307 62.482,41.825 61.93,41.825 U6.6 ; R9.2@56.075,45.725 56.1,45.725 R9.2@56.5,45.325 ; R9.2@56.5,45.3 R9.2@56.5,45.325 ; R9.2 R9.2@56.5,45.325 ; U6.6@61.645,41.94 60.46,41.94 59.2,43.2 58.1,43.2 56.508,44.792 56.508,45.317 R9.2@56.5,45.325
SDA_1V8: R11.2 ToF1.4 ToF2.4 ToF3.4 ToF4.4 U6.4 | length 35
  Top Layer w0.2: ToF4.4 63.947,13.611 63.947,33.97 ToF1.4 63.8,34.149 63.8,41.9 64.375,42.475 65.27,42.475 U6.4 66.375,42.575 68.592,44.792 68.592,45.075 68.655,45.138 R11.2@68.937,45.138
SDA_3V3: R8.2 U1.42 U6.5 | length 36
  Top Layer w0.2: U1.42 42.436,29.136 43.8,30.5 51.7,30.5 60.1,38.9 62.6,38.9 63.4,39.7 63.4,42.09 62.915,42.575 U6.5 ; R8.2 58.308,45.492 58.308,44.792 60.525,42.575 U6.5@61.817,42.575
TRIG_1: U1.4 US1.2 | length 30.7
  Top Layer w0.2: v1(29.85,29.85) 29.85,29.742 30.456,29.136 U1.4
  Bottom Layer w0.2: US1.2 6.654,34.625 12.079,29.2 17.713,29.2 18.363,29.85 v1(29.85,29.85)
TRIG_2: U1.2 US2.2 | length 21.6
  Top Layer w0.2: US2.2 14.854,34.625 18.329,31.15 31.7,31.15 32.914,29.936 U1.2
TRIG_3: U1.9 US3.2 | length 34.4
  Top Layer w0.2: US3.2 11.85,16.775 16.675,16.775 26.527,26.627 30.552,26.627 31.061,27.136 U1.9
TRIG_4: U1.7 US4.2 | length 22
  Top Layer w0.2: US4.2 19.25,22.225 24.475,27.45 30.025,27.45 30.511,27.936 U1.7
U\S\B\_\B\O\O\T\: Boot.3 Boot.4 R6.1 | length 9.6
  Top Layer w0.2: Boot.4@24.617,52.967 Boot.4@24.746,53.096 ; R6.1@24.75,50.35 24.75,51.45 24.746,51.446 Boot.4@24.746,53.096 ; Boot.3 Boot.4 Boot.4@24.746,53.096
UART1_RX: P2.2 U1.13 | length 29.6
  Top Layer w0.2: P2.2 18,8.4 22.2,12.6 22.2,14.8 32.863,25.463 33.842,25.463 33.915,25.536 U1.13
UART1_TX: P2.1 U1.12 | length 27.7
  Top Layer w0.2: P2.1 15.3,10.4 16.8,11.9 ; 16.775,11.9 28.125,23.25 29.888,23.25 32.574,25.936 U1.12
USB_GND: FB1.2 J1.4 J2.1 | length 17.4
  Top Layer w0.2: FB1.2 25.825,75.736 J2.1 27,71.98 27,66.8 28.635,65.165 33.379,65.165 33.433,65.219 33.869,65.219 J1.4
USB_VCC: C8.2 F1.2 Q1.3 | length 6.7
  Top Layer w0.2: Q1.3 Q1.3@7.55,67.6
  Top Layer w0.4: Q1.3@7.55,67.6 C8.2 10.366,67.584 12.3,67.584 12.85,67.034 F1.2@12.85,66.275
VREG_AVDD: C5.1 R1.2 U1.46 | length 6.4
  Top Layer w0.2: U1.46 40.47,31.629 42.525,33.684 42.525,33.8 C5.1 R1.2@42.9,36.375
VREG_LX: L1.2 U1.48 | length 6.6
  Top Layer w0.203: U1.48 39.67,32.774
  Top Layer w0.254: 39.67,32.774 39.67,35.925 40.663,36.919 L1.2@40.663,37.219
X\S\H\U\T\1\: ToF1.5 U1.41 | length 23.8
  Top Layer w0.2: U1.41 42.861,28.736 43.9,29.775 51.966,29.775 57.091,34.9 61.043,34.9 ToF1.5
X\S\H\U\T\2\: ToF2.5 U1.37 | length 23.9
  Top Layer w0.2: U1.37 43.864,27.136 46.3,24.7 52.9,24.7 56.6,28.4 60.752,28.4 ToF2.5
X\S\H\U\T\3\: ToF3.5 U1.35 | length 23.3
  Top Layer w0.2: U1.35 42.789,26.336 46.025,23.1 59.21,23.1 ToF3.5
X\S\H\U\T\4\: ToF4.5 U1.33 | length 25.8
  Top Layer w0.2: U1.33 41.989,25.536 45.625,21.9 51.5,21.9 56.5,16.9 58.619,16.9 ToF4.5
XIN: C22.1 U1.21 Y1.1 | length 13.1
  Top Layer w0.2: Y1.1 36.9,12.15 37.325,12.575 37.325,12.7 37.7,13.075 37.7,15.537 37.162,16.075 37.125,16.075 36.5,16.7 36.5,20.996 36.87,21.366 U1.21
XOUT: R5.2 U1.22 | length 3.6
  Top Layer w0.2: R5.2@37.27,20.53 U1.22
  Top Layer w0.254: R5.2@37.27,20.53 R5.2
pads on no net: U1.24 U1.25 U3.1 U3.2 U3.3 U5.4

## Polygon pours and split planes (outlines as drawn)
GND on Top Layer "T.GND-1" (solid, pour order 0): 41.625,17.9 42.6,16.925 42.6,9.7 33.1,9.7 33.1,16.952 33.947,17.9
5V on Top Layer "T.5V" (solid, pour order 1): -4,22.152 3.804,22.119 12.9,22.119 15.219,22.125 16.919,23.825 16.919,37.288 10.6,43.648 10.6,48.15 14.675,52.225 14.675,61.663 8.994,67.344 -4,67.344
1V1 on Top Layer "T.1V1-1" (solid, pour order 3): 35.5,29.7 39.9,29.7 39.9,25.3 35.5,25.3
3V3 on Top Layer "T.3V3-1" (solid, pour order 4): 42.45,22.95 32.725,22.95 32.725,32.475 42.45,32.475
3V3 on Top Layer "T.3V3-2" (solid, remove dead copper, pour order 6): -3.098,-2.802 cw(c-0.93,-0.634) -3.996,-0.634 -3.996,76.326 cw(c-0.93,76.326) -3.098,78.494 -2.894,78.698 cw(c-0.726,76.53) -0.726,79.596 70.234,79.596 cw(c70.234,76.53) 72.402,78.698 72.606,78.494 cw(c70.438,76.326) 73.504,76.326 73.504,-0.634 cw(c70.438,-0.634) 72.606,-2.802 72.402,-3.006 cw(c70.234,-0.838) 70.234,-3.904 -0.726,-3.904 cw(c-0.726,-0.838) -2.894,-3.006
GND on Bottom Layer "B.GND-1" (solid, pour order 8): -3.102,-2.898 cw(c-0.934,-0.73) -4,-0.73 -4,76.23 cw(c-0.934,76.23) -3.102,78.398 -2.898,78.602 cw(c-0.73,76.434) -0.73,79.5 70.23,79.5 cw(c70.23,76.434) 72.398,78.602 72.602,78.398 cw(c70.434,76.23) 73.5,76.23 73.5,-0.73 cw(c70.434,-0.73) 72.602,-2.898 72.398,-3.102 cw(c70.23,-0.934) 70.23,-4 -0.73,-4 cw(c-0.73,-0.934) -2.898,-3.102

## Keep-outs
Keep-Out Layer:
  lines w0.5: -0.73,-4 cw(c-0.73,-0.934) -2.898,-3.102 -3.102,-2.898 cw(c-0.934,-0.73) -4,-0.73 -4,76.23 cw(c-0.934,76.23) -3.102,78.398 -2.898,78.602 cw(c-0.73,76.434) -0.73,79.5 70.23,79.5 cw(c70.23,76.434) 72.398,78.602 72.602,78.398 cw(c70.434,76.23) 73.5,76.23 73.5,-0.73 cw(c70.434,-0.73) 72.602,-2.898 72.398,-3.102 cw(c70.23,-0.934) 70.23,-4 -0.5,-4

## Silkscreen, mask and mechanical layers (free items; w line width, h text height)
Top Overlay:
  drawing of 51 lines, arcs and shapes, not listed
  text "Distance Sensor Board [v1]" at 42.004,76.154 h1.02
  text "Aiden Shepler" at 42.054,74.318 h1.02
  text "11/23/2025" at 57.429,74.104 h1.02
  text "Power" at 15.103,70.203 h0.89
  text "MCU & Peripherals" at 51.399,65.997 h0.89 r270
  text "5V" at -1.447,48.153 h0.89
  text "Time of Flight Sensors" at 52.799,47.797 h0.89 r270
  text "GND" at -1.847,45.953 h0.89
  text "Ultrasonic Sensors" at 4.103,39.303 h0.89
  text "5V" at -1.357,36.181 h0.89
  text "TRIG" at -2.197,34.203 h0.89
  text "ECHO" at -2.097,32.203 h0.89
  text "GND" at -1.802,30.181 h0.89
  text "pTX" at -0.902,10.104 h0.89
  text "XSHUT" at 61.512,9.715 h0.89 r270
  text "SDA" at 63.503,9.697 h0.89 r270
  text "SCL" at 65.603,9.697 h0.89 r270
  text "INT0" at 59.506,9.197 h0.89 r270
  text "GND" at 67.507,8.826 h0.89 r270
  text "1V8" at 57.524,8.752 h0.89 r270
  text "5V" at 69.513,8.382 h0.89 r270
  text "pRX" at -0.902,8.104 h0.89
  text "1V8" at 63.627,6.873 h0.51 r270
  text "1V8" at 65.827,6.873 h0.51 r270
  text "GND" at -0.902,5.956 h0.89
  text "GPIO10" at 22.796,0.627 h0.51
  text "11" at 26.394,0.627 h0.51
  text "12" at 28.849,0.57 h0.51
  text "13" at 31.389,0.47 h0.51
  text "14" at 33.929,0.47 h0.51
  text "15" at 36.469,0.47 h0.51
  text "16" at 39.009,0.47 h0.51
  text "17" at 41.549,0.47 h0.51
  text "18" at 44.089,0.47 h0.51
  text "GPIO19" at 45.656,0.427 h0.51
  text "GND" at 43.793,-0.973 h0.51
  text "3V3" at 23.473,-1.073 h0.51
  text "3V3" at 26.013,-1.073 h0.51
  text "GND" at 28.553,-1.073 h0.51
  text "GND" at 31.093,-1.073 h0.51
  text "GND" at 33.633,-1.073 h0.51
  text "GND" at 36.173,-1.073 h0.51
  text "GND" at 38.713,-1.073 h0.51
  text "GND" at 41.253,-1.073 h0.51
  text "GND" at 46.333,-1.073 h0.51
Bottom Overlay:
  drawing of 10 lines, arcs and shapes, not listed
  text "(69.5mm MH to MH) 78mm" at 21.872,77.403 h0.89
  text "2.54mm" at 9.022,72.903 h0.89
  text "(75.5mm MH to MH) 83.5mm" at -2.597,51.828 h0.89 r270